# EAGLE board shield (EAGLE 9.6.2)
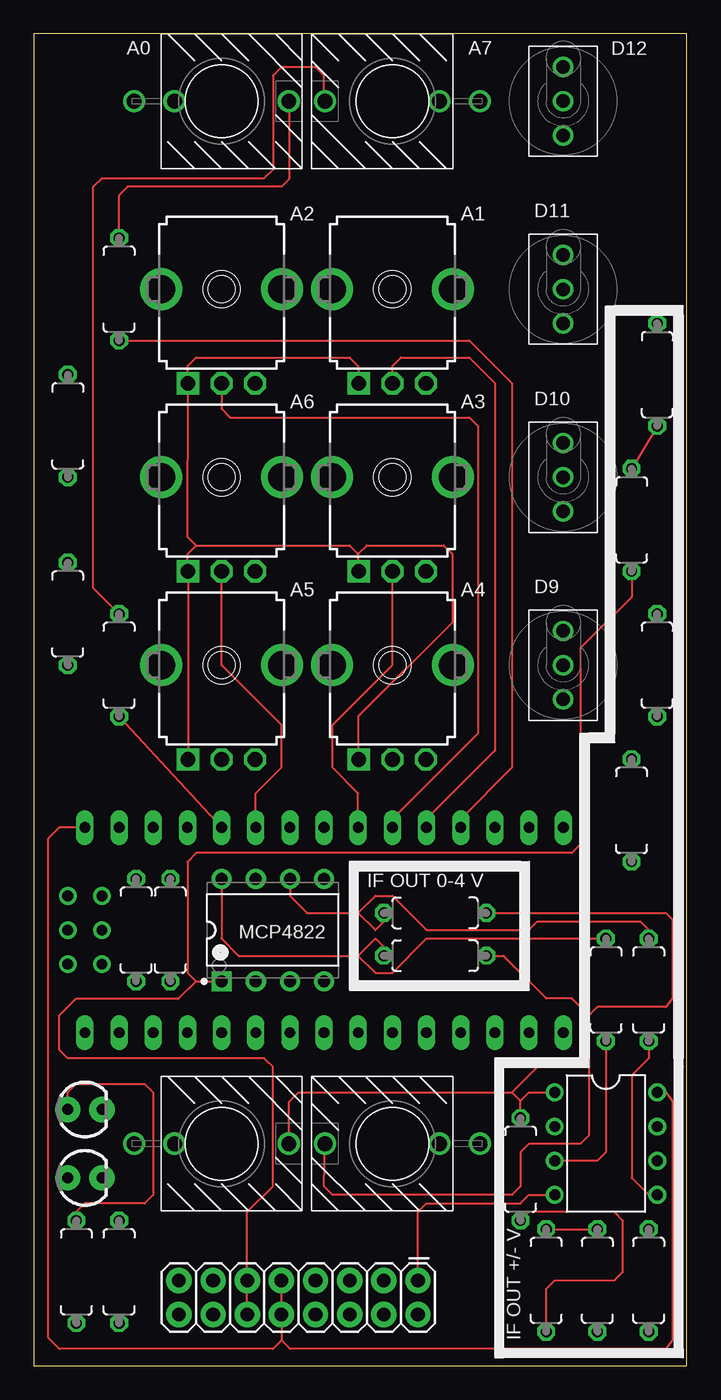
[diagram p0: board, top side]
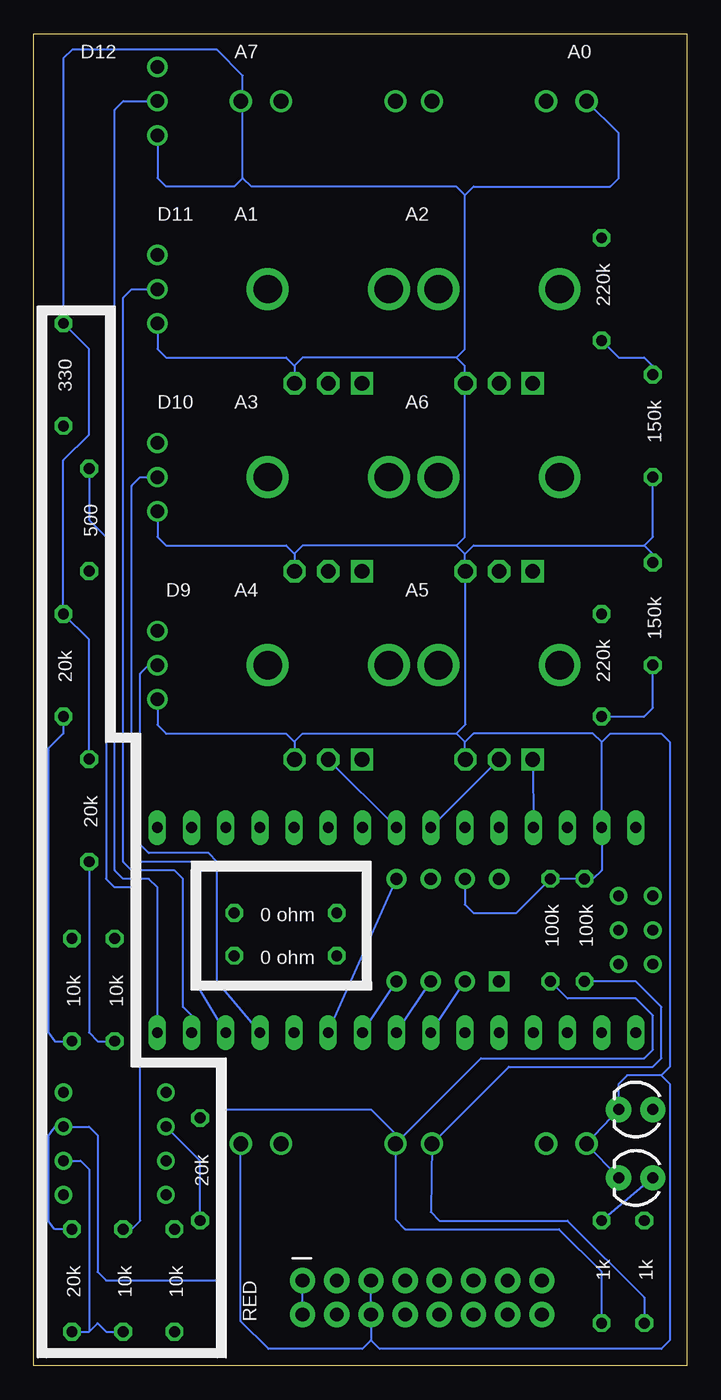
[diagram p1: board, bottom side, seen from below]

Size 48.57 x 99 mm. Coordinates in mm from the lower left corner, seen from the top.
Outline: 0,0 48.57,0 48.57,99 0,99 0,0
Copper layers (1*16): Top 0.035mm / dielectric 1.5mm / Bottom 0.035mm
Design rules "default": minimum track width 6mil, minimum drill 0.35mm, track to track 6mil, track to pad 6mil, pad to pad 6mil, via to via 6mil, smd to smd 6mil, copper to edge 40mil, drill to drill 6mil, minimum pad ring 10mil, minimum via ring 8mil, stop-mask expansion 4mil, vias tented up to drill 0mil, thermal gap 10mil

## Footprints (pad centres in the part's own frame; a part is rotated, then mirrored left to right if it is on the bottom)
7MM_RESISTOR = drill 0.813 octagon: 1 -3.81,0; 2 3.81,0
WQP-PJ366ST_JACK = drill 1.1: P$1_TIP 0,5; P$2_SWITCH 0,-3.5; P$3_SLEEVE 0,-6.5
9MM_SNAP-IN_POT = drill 1.1 square: 1 -2.5,-7 | drill 1.1 octagon: 2 0,-7; 3 2.5,-7 | drill 2.1 pad 2.794: CHASSIS1 -4.5,0; CHASSIS2 4.5,0
SUBMINI_TOGGLE = drill 1 pad 1.422: 1 -2.54,0; 3 2.54,0; COM 0,0
LED_3MM = drill 0.813 pad 1.88: A -1.27,0; K 1.27,0
DIL08 = drill 0.813 pad 1.27: 1 -3.81,-3.81; 2 -1.27,-3.81; 3 1.27,-3.81; 4 3.81,-3.81; 5 3.81,3.81; 6 1.27,3.81; 7 -1.27,3.81; 8 -3.81,3.81
2X8 = drill 1.016 pad 1.88: 1 0,0; 2 0,2.54; 3 2.54,0; 4 2.54,2.54; 5 5.08,0; 6 5.08,2.54; 7 7.62,0; 8 7.62,2.54; 9 10.16,0; 10 10.16,2.54; 11 12.7,0; 12 12.7,2.54; 13 15.24,0; 14 15.24,2.54; 15 17.78,0; 16 17.78,2.54
MICROCHIP_MCP4822-E-P_0 = drill 0.9 pad 1.5 square: 1 -3.81,3.81 | drill 0.9 pad 1.5: 2 -3.81,1.27; 3 -3.81,-1.27; 4 -3.81,-3.81; 5 3.81,-3.81; 6 3.81,-1.27; 7 3.81,1.27; 8 3.81,3.81
NANO = drill 0.8 long: 3.3V -10.16,24.13; 5V -10.16,-1.27; A0 -10.16,19.05; A1 -10.16,16.51; A2 -10.16,13.97; A3 -10.16,11.43; A4 -10.16,8.89; A5 -10.16,6.35; A6 -10.16,3.81; A7 -10.16,1.27; AREF -10.16,21.59; D2 5.08,1.27; D3 5.08,3.81; D4 5.08,6.35; D5 5.08,8.89; D6 5.08,11.43; D7 5.08,13.97; D8 5.08,16.51; D9 5.08,19.05; D10 5.08,21.59; D11 5.08,24.13; D12 5.08,26.67; D13 -10.16,26.67; GND -10.16,-6.35; GND1 5.08,-1.27; RAW -10.16,-8.89; RST -10.16,-3.81; RST1 5.08,-3.81; RX1 5.08,-6.35; TX0 5.08,-8.89 | drill 0.8: ICSP1 -5.08,-10.16; ICSP2 -5.08,-7.62; ICSP3 -2.54,-10.16; ICSP4 -2.54,-7.62; ICSP5 0,-10.16; ICSP6 0,-7.62

## Placement (x,y rotation side)
1A_150  [7MM_RESISTOR]  2.54,69.85 270 top
1A_220  [7MM_RESISTOR]  6.35,80.01 90 top
1B_150  [7MM_RESISTOR]  2.54,55.88 90 top
1B_220  [7MM_RESISTOR]  6.35,52.07 90 top
10K_B  [7MM_RESISTOR]  38.1,6.35 90 top
10K_D  [7MM_RESISTOR]  41.91,6.35 90 top
10K_DACA  [7MM_RESISTOR]  42.55,27.94 270 top
10K_DACB  [7MM_RESISTOR]  45.72,27.94 270 top
20K_A  [7MM_RESISTOR]  44.45,41.27 90 top
20K_B  [7MM_RESISTOR]  46.35,52.07 90 top
20K_C  [7MM_RESISTOR]  36.2,14.61 90 top
20K_D  [7MM_RESISTOR]  45.72,6.35 90 top
100K_GND  [7MM_RESISTOR]  10.16,32.38 90 top
100K_GND1  [7MM_RESISTOR]  7.62,32.38 90 top
330  [7MM_RESISTOR]  46.35,73.66 270 top
500  [7MM_RESISTOR]  44.45,62.87 270 top
A0  THONKI-STEREO  [WQP-PJ366ST_JACK]  13.97,93.98 270 top
A1  [9MM_SNAP-IN_POT]  26.67,80.01 0 top
A2  [9MM_SNAP-IN_POT]  13.97,80.01 0 top
A3  [9MM_SNAP-IN_POT]  26.67,66.04 0 top
A4  [9MM_SNAP-IN_POT]  26.67,52.07 0 top
A5  [9MM_SNAP-IN_POT]  13.97,52.07 0 top
A6  [9MM_SNAP-IN_POT]  13.97,66.04 0 top
A7  THONKI-STEREO  [WQP-PJ366ST_JACK]  26.67,93.98 90 top
D9  SUBMINI_SPDT  [SUBMINI_TOGGLE]  39.37,52.07 270 top
D10  SUBMINI_SPDT  [SUBMINI_TOGGLE]  39.37,66.04 270 top
D11  SUBMINI_SPDT  [SUBMINI_TOGGLE]  39.37,80.01 270 top
D12  SUBMINI_SPDT  [SUBMINI_TOGGLE]  39.37,93.98 270 top
DOA  [LED_3MM]  3.81,19.05 0 top
DOB  [LED_3MM]  3.81,13.97 0 top
IC1  TL072P  [DIL08]  42.55,16.51 270 top
J1  [2X8]  28.57,6.35 180 top
OUTA  THONKI-STEREO  [WQP-PJ366ST_JACK]  13.97,16.51 270 top
OUTB  THONKI-STEREO  [WQP-PJ366ST_JACK]  26.67,16.51 90 top
PASS_A  [7MM_RESISTOR]  29.84,30.48 180 top
PASS_B  [7MM_RESISTOR]  29.84,33.66 180 top
R_LED_A  [7MM_RESISTOR]  3.17,6.99 90 top
R_LED_B  [7MM_RESISTOR]  6.35,6.99 90 top
U1  MICROCHIP_MCP4822-E-PMICROCHIP_MCP4822-E-P_0_0  [MICROCHIP_MCP4822-E-P_0]  17.78,32.38 90 top
U$1  NANO  [NANO]  12.7,29.84 270 top

## Library data of the parts
1A_150 1A_220 1B_150 1B_220 10K_B 10K_D 10K_DACA 10K_DACB 20K_A 20K_B 20K_C 20K_D 100K_GND 100K_GND1 330 500 A0 A1-A7 D9-D12 OUTA OUTB PASS_A PASS_B R_LED_A R_LED_B = MusicThingModular
DOA DOB = SparkFun-LED; PROD_ID: DIO-08794
IC1 = linear
J1 = SparkFun-Connectors
U1 = MCP4822-DIP; CIIVA_IDS: 2294762; CODE__JEDEC: MS-001; COMPONENT_LINK_1_DESCRIPTION: Manufacturer URL; COMPONENT_LINK_1_URL: http://www.microchip.com/; COMPONENT_LINK_3_DESCRIPTION: Package Specification; COMPONENT_LINK_3_URL: http://www.microchip.com/stellent/groups/techpub_sg/documents/packagingspec/en012702.pdf; DATASHEET: http://ww1.microchip.com/downloads/en/DeviceDoc/22249A.pdf; DATASHEET_VERSION: revA, Apr-2010; FOOTPRINT_VARIANT_NAME_0: Manufacturer Recommended; IMPORTED: yes; IMPORTED_FROM: vault; IMPORT_TS: 1521866553; MF: Microchip; MPN: MCP4822-E/P; PACKAGE: PDIP300-P8; PACKAGE_DESCRIPTION: 8-Lead Plastic Dual In-Line (P) - 300 mil Body [PDIP]; PACKAGE_VERSION: revBB, Aug-2009; PIN_0_0_3_INSIDE_EDGE: clock; PREFIX: U; RELEASE_DATE: 1331947821; VAULT_GUID: 94E75BEE-D2D1-4E0D-ABEB-B73911AD75B5; VAULT_REVISION: C4C10C9A-AFC4-4D2D-B34D-EBD3545DE0A8
U$1 = Arduino-clone

## Nets
N$1: D12.COM U$1.D12
N$2: D11.COM U$1.D11
N$3: A1.2 U$1.A1
N$4: 1A_150.2 1B_150.2 20K_A.2 20K_B.2 100K_GND1.2 100K_GND.2 330.1 A0.P$3_SLEEVE A1.3 A2.3 A3.3 A4.3 A5.3 A6.3 A7.P$3_SLEEVE D9.3 D10.3 D11.3 D12.3 DOA.K DOB.K J1.5 J1.6 OUTA.P$3_SLEEVE OUTB.P$3_SLEEVE U1.7 U$1.GND
N$5: D10.COM U$1.D10
N$6: 1A_150.1 1A_220.1 U$1.A0
N$7: 1A_220.2 A0.P$1_TIP
N$8: A1.1 A2.1 A3.1 A4.1 A5.1 A6.1 U$1.5V
N$9: A2.2 U$1.A2
N$10: IC1.4 J1.1 J1.2
N$11: A3.2 U$1.A3
N$12: A6.2 U$1.A6
N$13: 10K_DACA.1 PASS_A.2 U1.8
N$14: 10K_DACB.1 PASS_B.2 U1.6
N$15: A4.2 U$1.A4
N$16: 1B_150.1 1B_220.1 U$1.A7
N$17: A5.2 U$1.A5
N$18: 20K_C.2 100K_GND1.1 IC1.1 OUTA.P$1_TIP PASS_A.1 R_LED_A.1
N$19: D9.COM U$1.D9
N$20: 10K_D.1 20K_D.1 IC1.6
N$21: 10K_DACA.2 20K_A.1 IC1.3
N$22: 10K_B.1 20K_C.1 IC1.2
N$23: 10K_DACB.2 20K_B.1 IC1.5
N$24: 1B_220.2 A7.P$1_TIP
N$25: 10K_B.2 10K_D.2 330.2 500.1
N$27: 20K_D.2 100K_GND.1 IC1.7 OUTB.P$1_TIP PASS_B.1 R_LED_B.1
N$30: U1.2 U$1.D4
N$31: U1.3 U$1.D5
N$32: U1.4 U$1.D6
N$33: U1.5 U$1.D7
N$38: DOB.A R_LED_B.2
N$39: DOA.A R_LED_A.2
N$46: 500.2 J1.11 J1.12 U1.1
N$47: IC1.8 J1.9 J1.10 U$1.RAW

## Tracks (layer width: path | path; a pad name or v marks a point on that pad's centre or on a via)
N$1
  Bottom 0.152: D12.COM 41.91,93.98 42.55,93.34 42.55,36.83 41.91,36.2 40.01,36.2 39.37,35.56 U$1.D12
N$2
  Bottom 0.152: D11.COM 41.27,80.01 41.91,79.38 41.91,37.47 41.27,36.83 38.1,36.83 37.47,36.2 37.47,26.67 36.83,26.04 U$1.D11
N$3
  Top 0.152: A1.2 26.67,74.3 27.3,74.93 32.38,74.93 34.29,73.03 34.29,45.72 29.21,40.64 U$1.A1
N$4
  Bottom 0.152: A2.3 16.51,73.05 | 16.51,73.05 16.51,74.3 17.14,74.93 | 17.14,74.93 28.57,74.93 29.17,74.33 29.17,74.3 | 29.17,74.3 A1.3 | 16.51,60.33 16.51,59.08 A6.3 16.47,47.66 17.14,46.99 | 17.14,60.96 16.51,60.33 | 17.14,60.96 28.57,60.96 29.17,60.37 29.17,60.33 | 29.17,60.33 A3.3 | A5.3 16.51,45.11 16.51,46.35 | 16.51,46.35 17.14,46.99 | 17.14,46.99 28.57,46.99 29.17,46.4 29.17,46.35 | 29.17,46.35 A4.3 | D10.3 39.37,61.59 38.73,60.96 29.8,60.96 29.17,60.33 | D9.3 39.37,47.62 38.73,46.99 29.8,46.99 29.17,46.35 | D11.3 39.37,75.56 38.73,74.93 29.8,74.93 29.17,74.3 | U1.7 16.51,34.29 15.88,33.66 12.7,33.66 100K_GND.2 100K_GND1.2 6.99,36.2 6.35,36.83 U$1.GND 6.35,46.35 | 6.35,46.35 6.99,46.99 15.88,46.99 16.51,46.35 | 17.14,60.96 16.51,61.59 16.51,73.05 | 17.14,74.93 16.51,75.56 16.51,87 | 16.51,87 17.14,87.63 32.38,87.63 33.02,88.27 | 16.51,87 15.88,87.63 5.71,87.63 5.08,88.27 5.08,91.59 A0.P$3_SLEEVE | 16.51,60.33 15.88,60.96 3.17,60.96 | 3.17,60.96 2.54,61.59 1A_150.2 | 3.17,60.96 2.54,60.33 1B_150.2 | 6.35,46.35 5.71,46.99 1.91,46.99 1.27,46.35 1.27,22.23 1.91,21.59 | 1.91,21.59 4.45,21.59 5.08,20.95 DOA.K OUTA.P$3_SLEEVE DOB.K | J1.5 J1.6 23.5,1.91 | 1.91,21.59 1.27,20.95 1.27,1.91 1.91,1.27 22.86,1.27 23.5,1.91 | D12.3 39.37,88.27 38.73,87.63 33.66,87.63 33.02,88.27 | 33.02,88.27 33.02,93.83 A7.P$3_SLEEVE 33.02,94.13 33.02,95.89 34.92,97.79 45.72,97.79 46.35,97.16 330.1 44.45,75.56 44.45,69.22 46.35,67.31 20K_B.2 44.45,53.98 20K_A.2 | 23.5,1.91 24.13,1.27 31.11,1.27 33.17,3.33 OUTB.P$3_SLEEVE
N$5
  Bottom 0.152: D10.COM 40.64,66.04 41.27,65.41 41.27,38.1 40.64,37.47 36.83,37.47 36.2,36.83 36.2,27.94 U$1.D10
N$6
  Top 0.152: 1A_220.1 32.38,76.2 35.56,73.03 35.56,44.45 31.75,40.64 U$1.A0
  Bottom 0.152: 1A_150.1 2.54,74.3 3.17,74.93 5.08,74.93 1A_220.1
N$7
  Top 0.152: A0.P$1_TIP 18.97,88.19 18.41,87.63 6.99,87.63 6.35,87 1A_220.2
N$8
  Top 0.152: 12.06,60.96 11.43,60.33 A6.1 A5.1 | 12.06,60.96 23.5,60.96 24.13,60.33 | A3.1 24.13,60.33 | 12.06,60.96 11.43,61.59 A2.1 11.43,74.3 12.06,74.93 23.5,74.93 24.13,74.3 A1.1 | 24.13,60.33 24.77,60.96 30.48,60.96 31.11,60.33 31.11,55.24 24.13,48.26 24.13,45.11 A4.1
  Bottom 0.152: A5.1 U$1.5V
N$9
  Top 0.152: A2.2 13.97,71.12 14.61,70.48 32.38,70.48 33.02,69.85 33.02,46.99 26.67,40.64 U$1.A2
N$10
  Top 0.152: J1.1 28.57,11.43 29.21,12.06 36.2,12.06 36.83,12.7 IC1.4
  Bottom 0.152: J1.2 J1.1
N$11
  Top 0.152: U$1.A3 24.13,42.55 22.23,44.45 22.23,47.62 26.67,52.07 A3.2
N$12
  Top 0.152: U$1.A6 16.51,42.55 18.41,44.45 18.41,47.62 13.97,52.07 A6.2
N$13
  Top 0.152: U1.8 13.97,31.75 15.24,30.48 24.13,30.48 | 10K_DACA.1 29.21,31.75 26.67,29.21 25.4,29.21 24.13,30.48 | 24.13,30.48 25.4,31.75 26.04,31.11 PASS_A.2
N$14
  Top 0.152: U1.6 19.05,34.92 20.32,33.66 24.13,33.66 | 10K_DACB.1 45.72,32.38 45.09,33.02 37.47,33.02 36.83,32.38 29.21,32.38 26.67,34.92 25.4,34.92 24.13,33.66 | 24.13,33.66 25.4,32.38 26.04,33.02 PASS_B.2
N$15
  Bottom 0.152: A4.2 U$1.A4
N$16
  Top 0.152: 1B_220.1 U$1.A7
  Bottom 0.152: 1B_220.1 3.17,48.26 2.54,48.9 1B_150.1
N$17
  Bottom 0.152: A5.2 U$1.A5
N$18
  Top 0.152: OUTA.P$1_TIP 18.97,19.61 19.68,20.32 35.56,20.32 | IC1.1 36.83,20.32 36.2,19.68 | PASS_A.1 34.92,30.48 38.1,27.3 40.01,27.3 40.64,26.67 40.64,22.86 40.01,22.23 37.47,22.23 35.56,20.32 | 20K_C.2 36.2,19.68 | 36.2,19.68 35.56,20.32
  Bottom 0.152: R_LED_A.1 3.17,5.08 8.89,10.79 18.41,10.79 19.05,11.43 OUTA.P$1_TIP 13.26,22.23 2.54,22.23 1.91,22.86 1.91,26.67 3.81,28.57 100K_GND1.1
N$19
  Bottom 0.152: D9.COM 40.01,52.07 40.64,51.44 40.64,38.73 40.01,38.1 35.56,38.1 34.92,37.47 34.92,28.57 U$1.D9
N$20
  Bottom 0.152: 20K_D.1 44.45,2.54 | 10K_D.1 43.18,2.54 43.81,3.17 44.45,2.54 | IC1.6 45.09,15.24 44.45,14.61 44.45,2.54
N$21
  Top 0.152: 10K_DACA.2 42.55,15.88 41.91,15.24 IC1.3
  Bottom 0.152: 10K_DACA.2 43.81,24.13 44.45,24.77 20K_A.1
N$22
  Top 0.152: 10K_B.1 38.1,5.71 38.73,6.35 43.18,6.35 43.81,6.99 43.81,10.79 43.18,11.43 36.83,11.43 20K_C.1
  Bottom 0.152: IC1.2 36.2,15.24 20K_C.1
N$23
  Top 0.152: 10K_DACB.2 45.72,22.86 44.45,21.59 44.45,13.97 45.72,12.7 IC1.5
  Bottom 0.152: 20K_B.1 46.35,46.99 47.48,45.87 47.48,24.77 46.99,24.13 10K_DACB.2
N$24
  Top 0.152: 1B_220.2 4.45,57.78 4.45,87.63 5.08,88.27 17.14,88.27 17.78,88.9 17.78,95.89 18.41,96.52 20.95,96.52 21.59,95.89 21.59,94.06 A7.P$1_TIP
N$25
  Top 0.152: 330.2 500.1 | 10K_B.2 10K_D.2
  Bottom 0.152: 500.1 44.45,62.87 43.18,61.59 43.18,36.2 42.55,35.56 41.27,35.56 40.64,34.92 40.64,10.79 41.27,10.16 10K_D.2
N$27
  Top 0.152: PASS_B.1 46.99,33.66 47.48,33.17 47.48,27.3 46.99,26.67 41.91,26.67 41.27,26.04 41.27,17.14 40.64,16.51 36.83,16.51 36.2,15.88 36.2,13.34 35.56,12.7 22.23,12.7 21.59,13.34 OUTB.P$1_TIP
  Bottom 0.152: R_LED_B.1 6.35,6.99 9.53,10.16 20.95,10.16 21.67,10.88 OUTB.P$1_TIP | 20K_D.2 46.99,10.16 47.48,10.79 47.48,17.14 46.99,17.78 IC1.7 44.45,17.78 43.81,17.14 43.81,6.99 43.18,6.35 34.92,6.35 34.29,6.99 34.29,14.61 34.92,15.24 34.92,18.41 34.29,19.05 23.5,19.05 21.67,17.23 OUTB.P$1_TIP | OUTB.P$1_TIP 15.32,22.86 3.17,22.86 2.54,23.5 2.54,26.04 3.81,27.3 8.89,27.3 100K_GND.1
N$30
  Bottom 0.152: U$1.D4 U1.2
N$31
  Bottom 0.152: U$1.D5 U1.3
N$32
  Bottom 0.152: U$1.D6 U1.4
N$33
  Bottom 0.152: U$1.D7 U1.5
N$38
  Bottom 0.152: DOB.A R_LED_B.2
N$39
  Top 0.152: DOA.A 2.54,20.32 3.17,20.95 8.26,20.95 8.89,20.32 8.89,12.7 8.26,12.06 3.81,12.06 3.17,11.43 R_LED_A.2
N$46
  Top 0.152: J1.12 J1.11 15.88,11.43 17.78,13.34 17.78,22.23 17.14,22.86 2.54,22.86 1.91,23.5 1.91,26.04 3.17,27.3 10.79,27.3 12.06,28.57 | 12.06,28.57 U1.1 | 500.2 44.45,57.15 40.64,53.34 40.64,38.73 40.01,38.1 12.06,38.1 11.43,37.47 11.43,29.21 12.06,28.57
N$47
  Top 0.152: J1.9 J1.10 18.41,1.91 | U$1.RAW 1.91,40.01 1.09,39.19 1.09,2.08 1.91,1.27 17.78,1.27 18.41,1.91 | 18.41,1.91 19.05,1.27 46.99,1.27 47.48,1.91 47.48,19.68 46.99,20.32 IC1.8

## Text on the board
tPlace: IF OUT 0-4 V | MCP4822 | IF OUT +/- V
bPlace: A0 | A7 | D12 | A2 | A1 | D11 | 220k | 330 | A6 | A3 | D10 | 150k | 500 | A5 | A4 | D9 | 150k | 220k | 20k | 20k | 0 ohm | 100k | 100k | 0 ohm | 10k | 10k | 20k | 1k | 1k | RED | 10k | 10k | 20k